# Altium PCB ControllerBoard.PcbDoc
Units mm, origin at the board's own origin, x right, y up, seen from the top; angles counter-clockwise.
Board outline 38.1 x 43.5 mm, 2 copper layers (Top Layer, Bottom Layer); 38 components, 23 nets, 91 pads, 12 vias.
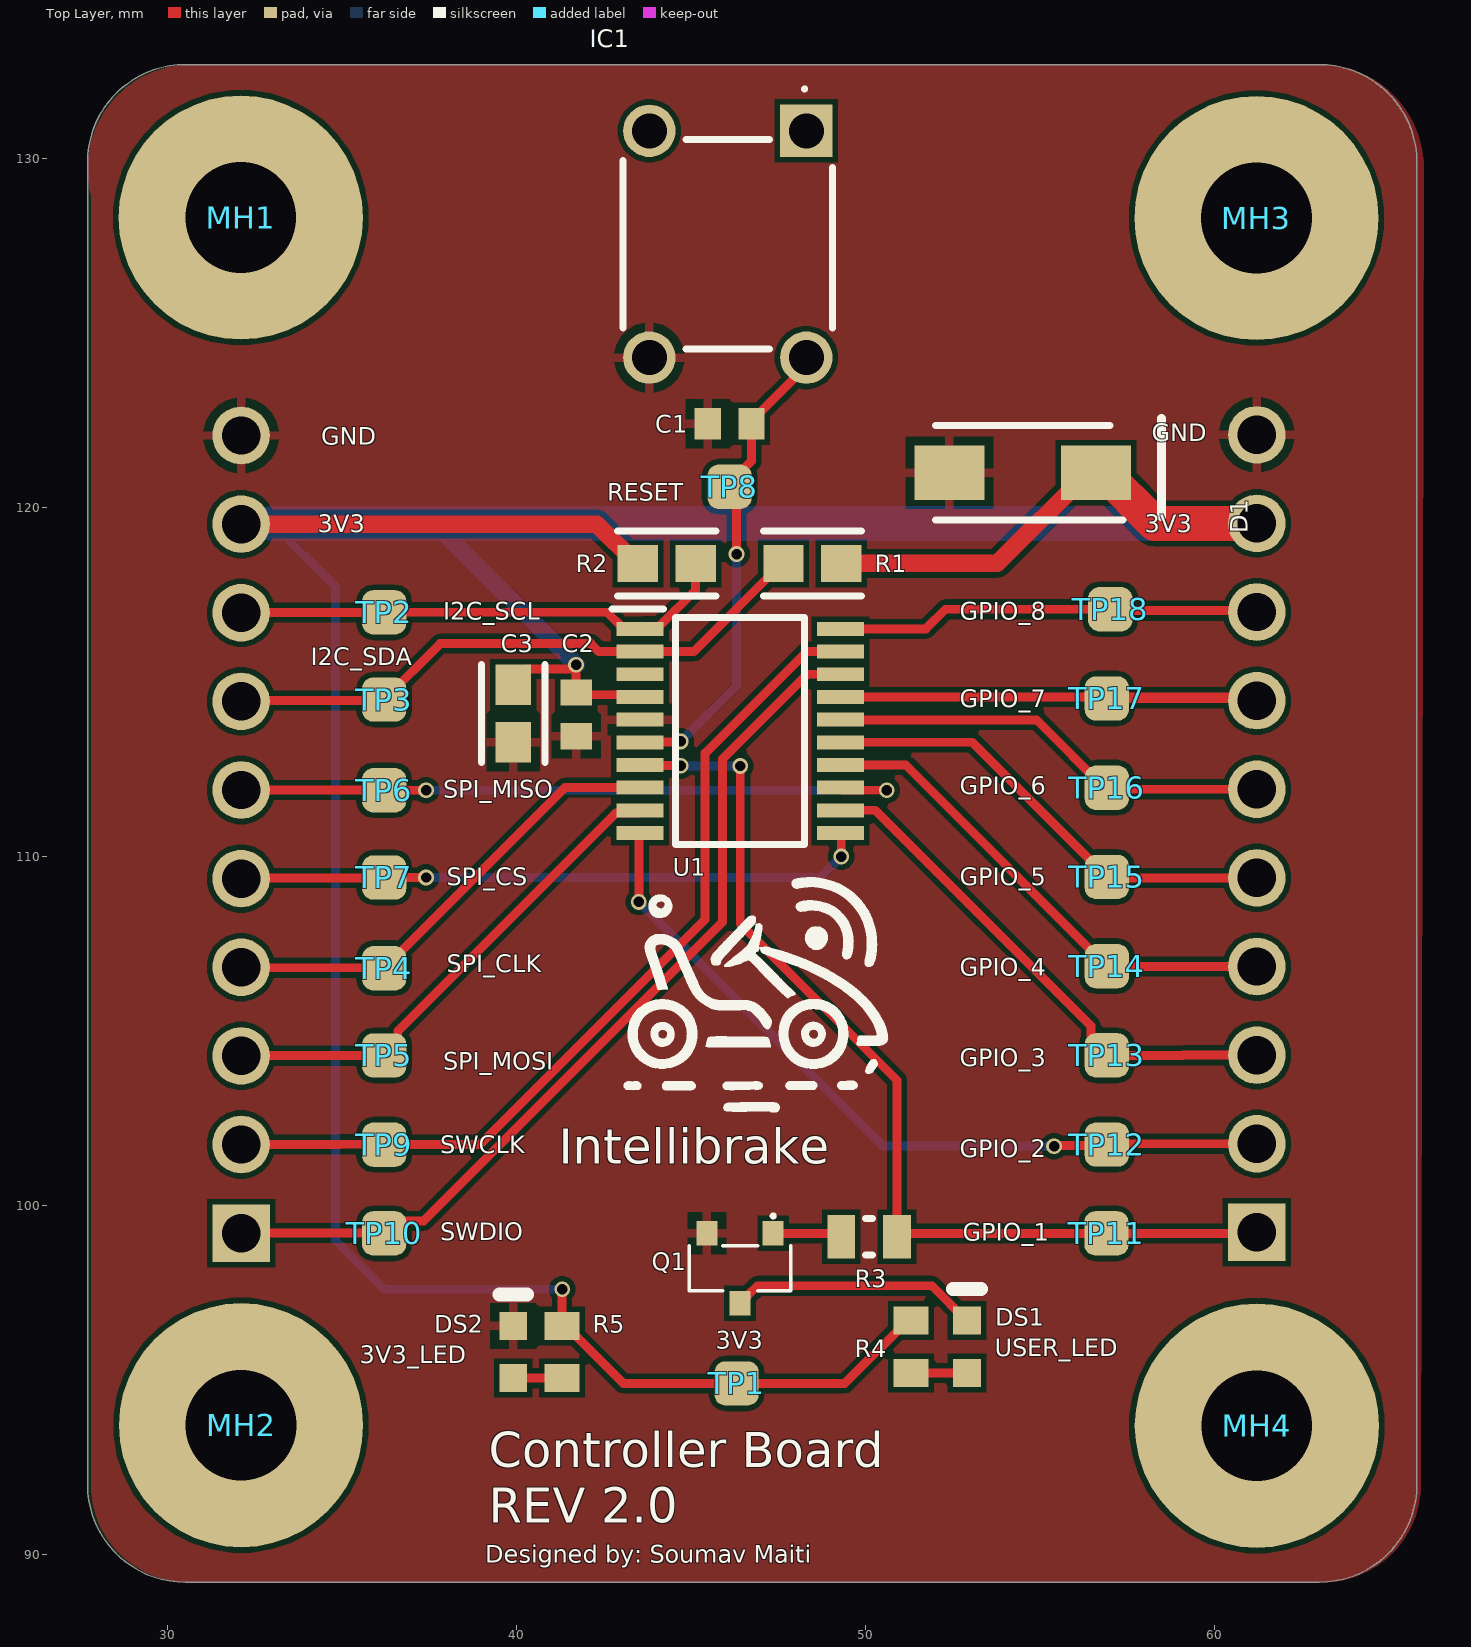
[diagram p0: Top Layer view]
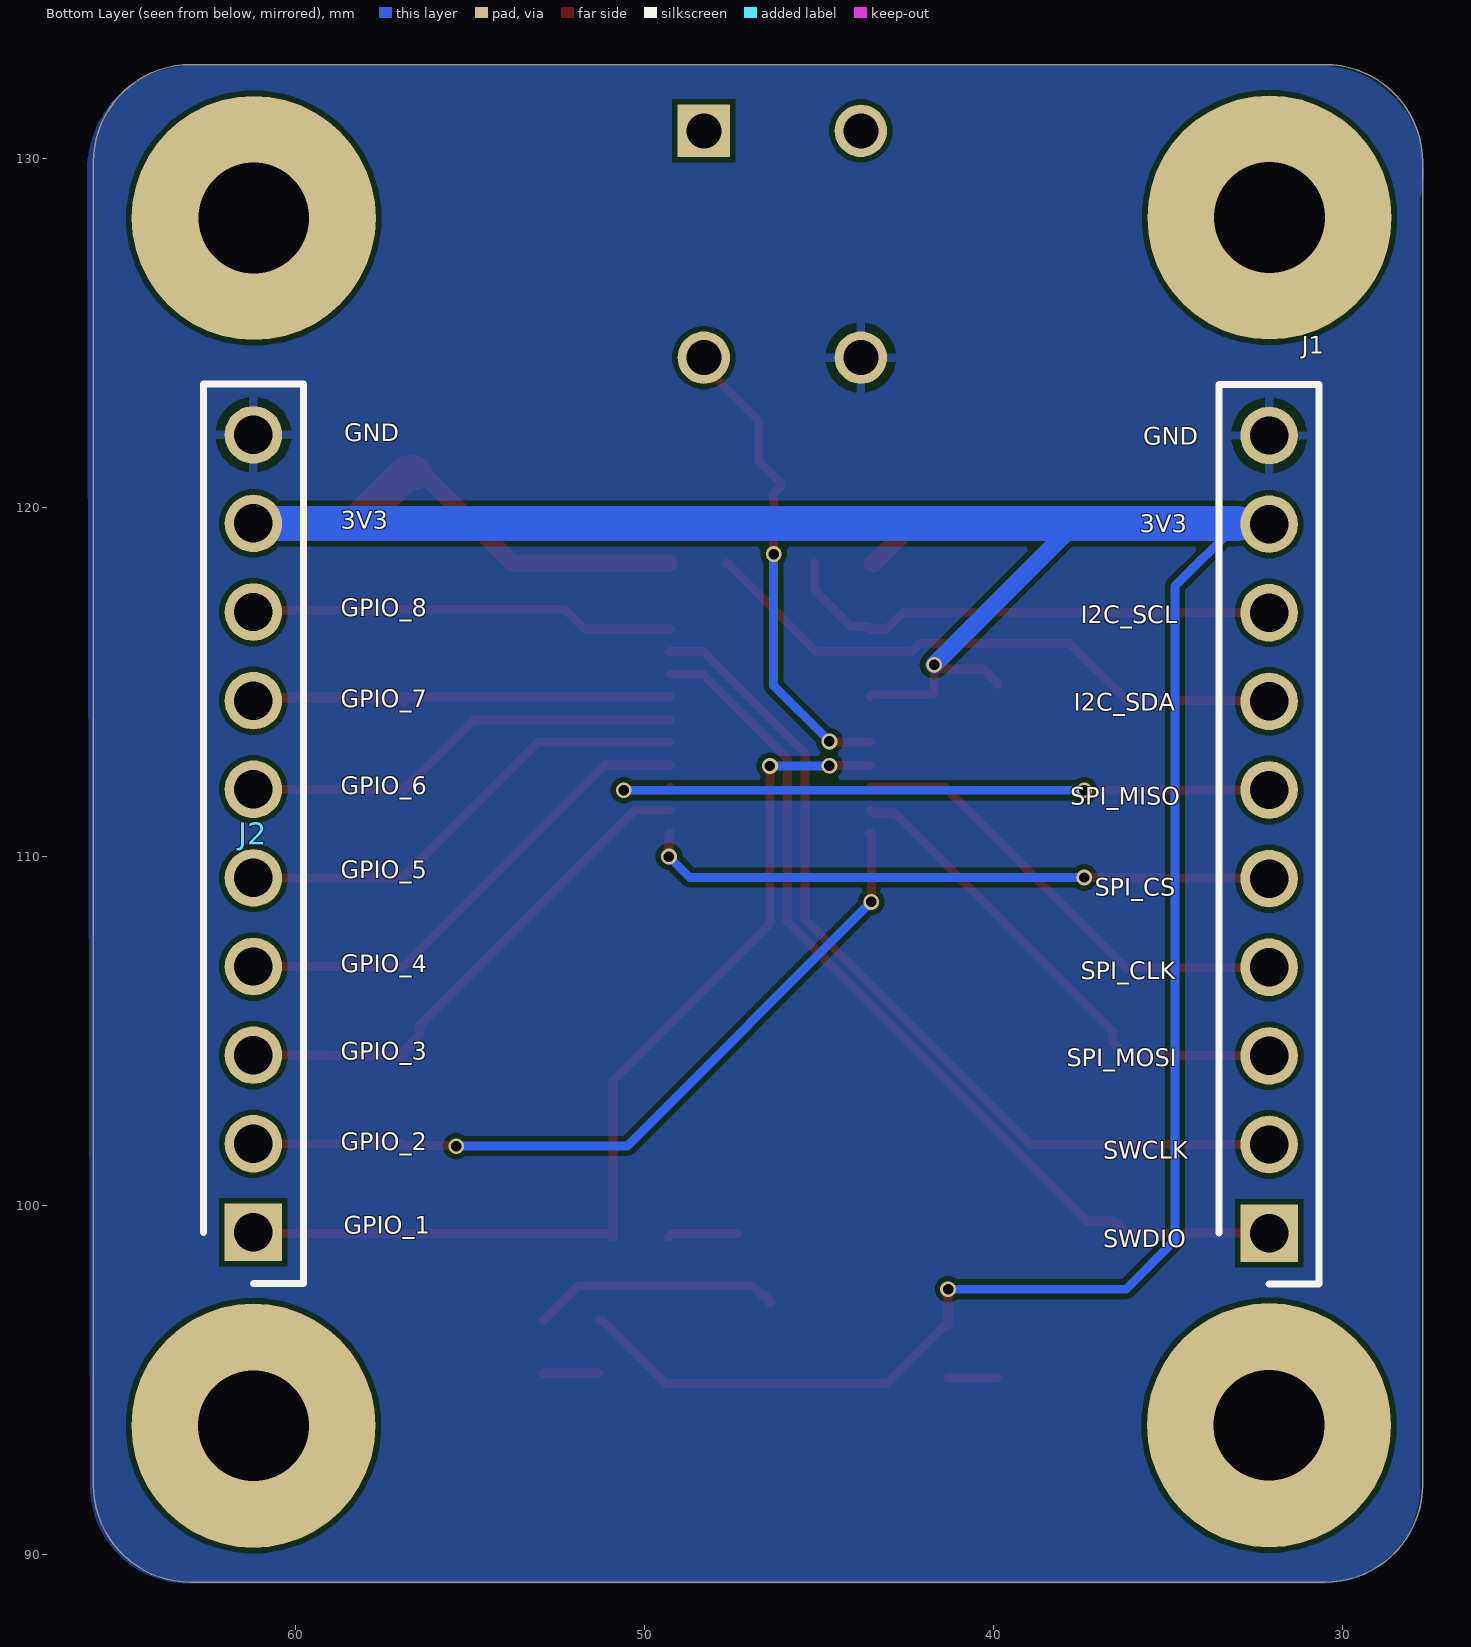
[diagram p1: Bottom Layer view, seen from below]
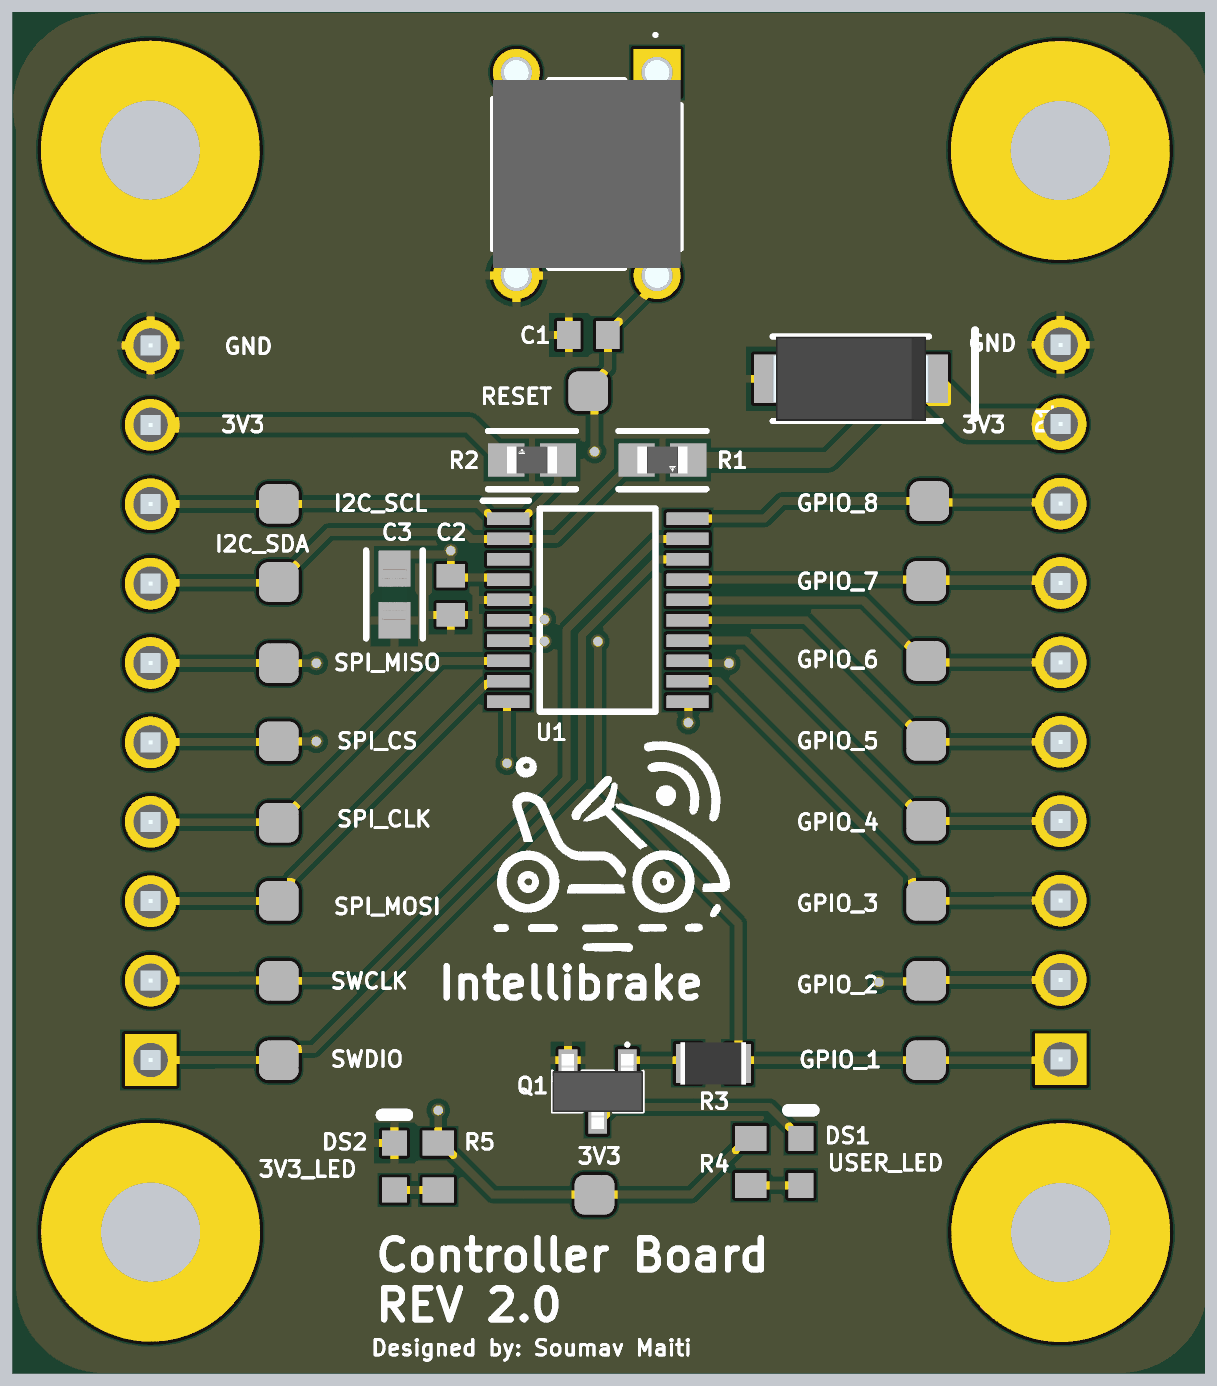
[diagram p2: 3D render of the assembled board from above, using the file's embedded part models]

## Layer stack, top to bottom
Top Solder: solder mask 0.0102, Solder Resist, Dk 3.5
Top Layer: signal copper 0.0356
Dielectric 1: dielectric 0.32, FR-4, Dk 4.8
Bottom Layer: signal copper 0.0356
Bottom Solder: solder mask 0.0102, Solder Resist, Dk 3.5

## Board outline
27.7,129.9 27.7,92 ccw(c30.5,92) 30.5,89.2 63,89.2 ccw(c63,92) 65.8,92 65.8,129.9 ccw(c63,129.9) 63,132.7 30.5,132.7 ccw(c30.5,129.9)

## Design rules (kind name [scope] priority, off if disabled: settings)
Clearance [All] p1: gap=0.15 ignorepadtopadclearanceinfootprint=FALSE except(0: SMDPad-Hole THPad-Hole Via-Hole Fill-Hole Poly-Hole Region-Hole Text-Hole; 0.254: Fill-Fill Fill-Poly Fill-Region Fill-Text Poly-Poly Poly-Region Poly-Text Region-Region Region-Text Text-Text)
HoleSize [All] p1: absolutevalues=TRUE maxlimit=5 minlimit=0.025 maxpercent=80.000 minpercent=20.000
PolygonConnect [All] p1: connectstyle=Relief reliefconductorwidth=0.254 reliefentries=4 polygonreliefangle="90 Angle" airgapwidth=0.254
RoutingVias [All] p1: holewidth=0.711 width=1.27 viastyle="Through Hole" minholewidth=0.711 minwidth=1.27 maxholewidth=0.711 maxwidth=1.27
SolderMaskExpansion [All] p1: expansion=0.102 istentingtop=FALSE
SupplyNets "Schematic Supply Nets_1" [InNet('GND')] p1: voltage=0.000
SupplyNets "Schematic Supply Nets" [InNet('3V3')] p2: voltage=0.000
Width [All] p1: maxlimit=2.54 minlimit=0.1 preferedwidth=0.254
29 further rules are at their usual default settings.

## Classes and differential pairs
component class MCU: C1 C2 C3 D1 DS1 DS2 IC1 J1 J2 MH1 MH2 MH3 MH4 Q1 R1 R2 R3 R4 R5 TP1 TP2 TP3 TP4 TP5 TP8 TP9 TP10 TP11 TP12 TP13 TP14 TP15 TP16 TP17 TP18 U1

## Components (designator, comment, footprint, x,y, rotation, side; value= is the part's Value field where it differs from the comment)
C1 "0.1uF" CAPC1608X92X38LL15T08 46.1,122.4 r0 top
C2 "0.1uF" CAPC1608X92X38LL15T08 41.7,114.075 r90 top
C3 "4.7uF" FP-CL10-IPC_A 39.9,114.1 r270 top
D1 "P4SMAJ5.0A" DIOM5027X240N 54.5,121 r180 top
DS1 "HSMY-C190" AVAG-HSMX-C190_V 52.9,95.95 r90 top
DS2 "HSMY-C190" AVAG-HSMX-C190_V 39.9,95.8 r90 top
IC1 "TS02-66-43-BK-160-SCR-D" TS026643BK160SCRD 48.3,130.8 r270 top
J1 "PH1-10-UA" HDRV10W64P0X254_1X10_2540X249X886P 32.1,99.208 r270 bottom
J2 "PH1-10-UA" HDRV10W64P0X254_1X10_2540X249X886P 61.211,99.228 r270 bottom
MH1 "MH?" "Mounting Hole" 32.089,128.312 r0 top
MH2 "MH?" "Mounting Hole" 32.1,93.7 r0 top
MH3 "MH?" "Mounting Hole" 61.2,128.3 r0 top
MH4 "MH?" "Mounting Hole" 61.211,93.688 r0 top
Q1 "T2N7002AK,LM" TBAT54CLM 46.4,98.2 r180 top
R1 "4.7k" FP-CRCW0603-HPe3-IPC_A 48.473,118.4 r0 top
R2 "4.7k" FP-CRCW0603-HPe3-IPC_A 44.3,118.4 r180 top
R3 "0Ohm" RESC2013X60X35LL10T20 50.1,99.1 r0 top
R4 "590" RESC1608X55X25ML10T15 51.3,95.95 r90 top
R5 "590" RESC1608X55X25ML10T15 41.3,95.8 r90 top
TP1 "TP" Testpoint 46.3,94.9 r90 top
TP2 "TP" Testpoint 36.2,117 r90 top
TP3 "TP" Testpoint 36.2,114.5 r180 top
TP4 "TP" Testpoint 36.2,106.8 r0 top
TP5 "TP" Testpoint 36.2,104.3 r0 top
TP6 "TP" Testpoint 36.2,111.9 r0 top
TP7 "TP" Testpoint 36.2,109.4 r0 top
TP8 "TP" Testpoint 46.1,120.6 r90 top
TP9 "TP" Testpoint 36.2,101.743 r270 top
TP10 "TP" Testpoint 36.2,99.2 r270 top
TP11 "TP" Testpoint 56.9,99.2 r270 top
TP12 "TP" Testpoint 56.911,101.745 r270 top
TP13 "TP" Testpoint 56.911,104.302 r270 top
TP14 "TP" Testpoint 56.911,106.859 r270 top
TP15 "TP" Testpoint 56.911,109.416 r270 top
TP16 "TP" Testpoint 56.911,111.973 r270 top
TP17 "TP" Testpoint 56.911,114.531 r270 top
TP18 "TP" Testpoint 57.011,117.088 r270 top
U1 "STM32C011F4P6" TSSOP20 46.4,113.6 r0 top

## Footprints (in the part's own frame and the unit in brackets; to place one, negate y for a bottom-side part, rotate by r counter-clockwise, add the part's x,y. Pads: shape width x height; smd on the part's side, far side on the other; paste and mask are expansions set on the pad)
AVAG-HSMX-C190_V [mm] "SMD, 2-Leads, Body 1.6x0.8mm, Height 0.9mm"
  rect 0.8x0.8 smd: 1(-0.75,0) 2(0.75,0)
  silkscreen extent 1.65,-0.4 1.65,0.4, body extent -0.8,-0.4 0.8,0.4, height 0.9
CAPC1608X92X38LL15T08 [mm] "Chip Capacitor, 2-Leads, Body 1.60x0.80mm, IPC High Density"
  rect 0.75x0.9 smd: 1(-0.625,0) 2(0.625,0)
  body extent -0.87,-0.48 0.87,0.48, height 0.92
DIOM5027X240N [mm]
  rect 2x1.55 smd: 1(-2.1,0) 2(2.1,0)
  silkscreen extent -3.98,-1.55 2.5,1.35, body extent -2.5,-1.35 2.5,1.35, height 2.4
FP-CL10-IPC_A [mm]
  rect 1.158x1.012 smd paste+0 mask+0: 1(-0.827,0) 2(0.827,0)
  silkscreen extent -1.41,-0.91 1.41,0.91, body extent -1.91,-1.01 1.91,1.01, height 0.25
FP-CRCW0603-HPe3-IPC_A [mm]
  rect 1.158x1.062 smd paste+0 mask+0: 1(-0.827,0) 2(0.827,0)
  silkscreen extent -1.41,-0.93 1.41,0.93, body extent -0.8,-0.43 0.8,0.43, height 0.55
HDRV10W64P0X254_1X10_2540X249X886P [mm]
  rect 1.65x1.65 hole 1.1: 1(0,0)
  round 1.65 hole 1.1: 2(-2.54,0) 3(-5.08,0) 4(-7.62,0) 5(-10.16,0) 6(-12.7,0) 7(-15.24,0) 8(-17.78,0) 9(-20.32,0) 10(-22.86,0)
  silkscreen extent -24.32,-1.44 1.46,1.43, body extent -24.13,-1.24 1.27,1.24, height 8.87
"Mounting Hole" [mm]
  round 7 hole 3.175: 4(0,0)
RESC1608X55X25ML10T15 [mm] "Chip Resistor, 2-Leads, Body 1.60x0.80mm, IPC Low Density"
  rect 0.8x1 smd: 1(-0.75,0) 2(0.75,0)
  body extent -0.85,-0.45 0.85,0.45, height 0.55
RESC2013X60X35LL10T20 [mm] "Chip Resistor, 2-Leads, Body 2.1x1.35mm, IPC High Density"
  rect 0.8x1.25 smd: 1(-0.8,0) 2(0.8,0)
  silkscreen extent -0.1,-0.53 0.1,0.52, body extent -1.05,-0.67 1.05,0.68, height 0.6
TBAT54CLM [mm]
  rect 0.6x0.7 smd: 1(-0.95,-1) 2(0.95,-1) 3(0,1)
  silkscreen extent -1.45,-1.55 1.45,0.65, body extent -1.45,-1.2 1.45,1.2, height 0.95
Testpoint [mm]
  rrect50% 1.27x1.27 smd: 0(0,0)
TS026643BK160SCRD [mm]
  rect 1.5x1.5 hole 1: 1(0,0)
  round 1.5 hole 1: 2(6.5,0) 3(0,-4.5) 4(6.5,-4.5)
  silkscreen extent -1.25,-5.25 6.25,0.75, body extent -0.4,-5.25 6.9,0.75, height 4.6
TSSOP20 [mm]
  rect 1.35x0.4 smd: 1(-2.863,2.925) 2(-2.863,2.275) 3(-2.863,1.625) 4(-2.863,0.975) 5(-2.863,0.325) 6(-2.863,-0.325) 7(-2.863,-0.975) 8(-2.863,-1.625) 9(-2.863,-2.275) 10(-2.863,-2.925) 11(2.875,-2.925) 12(2.875,-2.275) 13(2.875,-1.625) 14(2.875,-0.975) 15(2.875,-0.325) 16(2.875,0.325) 17(2.875,0.975) 18(2.875,1.625) 19(2.875,2.275) 20(2.875,2.925)
  silkscreen extent -3.68,-3.25 1.85,3.5, body extent -3.22,-3.25 3.2,3.25, height 1.35

## Part data
C1 C2: library part CMP-1035-02583-2, Manufacturer=Vitramon, Part Number=VJ0603Y104JXJAC
C3: library part CMP-13271-001817-1, "Cap Ceramic 4.7uF 6.3V X6S ±10% Pad SMD 0603 +105°C T/R", Case Code (Imperial)=0603, Case Code (Metric)=1608, Dielectric=X6S, Max Operating Temperature=105°C, Min Operating Temperature=-55°C, Package Quantity=1, Tolerance=10%, Voltage Rating=6.3V, Capacitance=4.7uF, Case/Package=0603, Depth=0.8mm, Height=0.8mm, Lead Free="Lead Free", Length=1.6mm, Mount="Surface Mount", Packaging="Tape and Reel", Radiation Hardening=No, Thickness=0.035inch, Voltage Rating (DC)=6.3V, Width=0.031inch
D1: "TVS Diode (Uni-directional)", Manufacturer_Name=Diotec, Datasheet Link=https://diotec.com/request/datasheet/p4smaj65.pdf, Height=2.4mm, Manufacturer_Part_Number=P4SMAJ5.0A
DS1 DS2: library part CMP-1744-00003-1, "LED Uni-Color Yellow, 65 mW, 20 mA, -40 to 85 degC, 2-Pin SMD, RoHS, Tape and Reel", Case Code (Imperial)=0603, Case Code (Metric)=1608, Max Operating Temperature="155 degC", Min Operating Temperature="-55 degC", Package Quantity=5000, Power Rating="100 mW", Resistance="390 Ohm", Tolerance=1%, Voltage Rating="50 V", Case\Package=0603, ComponentLink1Description="Manufacturer URL", ComponentLink1URL=http://www.avagotech.com/, ComponentLink2Description=Datasheet, ComponentLink2URL=http://docs.avagotech.com/docs/AV02-0551EN, ComponentLink3Description="Package Specification", ComponentLink3URL=http://www.fairchildsemi.com/dwg/MA/MA03D.pdf, DatasheetVersion=Mar-12, Height="0.45 mm", Length="1.6 mm", Mount="Surface Mount", PackageDescription="2-Pin Surface Mount Device, Body 1.6 x 0.8 mm, Height 0.9 mm", PackageReference=HSMX-C190, Packaging="Tape and Reel", Pins=2, REACH SVHC="No SVHC", RoHSCompliant=true, Voltage Rating (DC)="50 V", Width="0.8 mm"
IC1: "Integrated Circuit", Manufacturer_Name="Same Sky", Mouser Part Number=179-TS026643BK160SCR, Arrow Part Number=TS02-66-43-BK-160-SCR-D, Arrow Price/Stock=https://www.arrow.com/en/products/ts02-66-43-bk-160-scr-d/cui-devices?utm_currency=USD&region=nac, Datasheet Link=https://www.sameskydevices.com/product/resource/supplyframepdf/ts02.pdf, Height=4.5mm, Manufacturer_Part_Number=TS02-66-43-BK-160-SCR-D, Mouser Price/Stock=https://www.mouser.co.uk/ProductDetail/Same-Sky/TS02-66-43-BK-160-SCR-D?qs=A6eO%252BMLsxmTUKKq48hEHkA%3D%3D
J1 J2: "Connector", Manufacturer_Name="Adam Tech", Mouser Part Number=737-PH1-10-UA, Arrow Part Number=PH1-10-UA, Arrow Price/Stock=null?utm_currency=USD&region=nac, Datasheet Link=https://app.adam-tech.com/products/download/data_sheet/201605/ph1-xx-ua-data-sheet.pdf, Height=8.865mm, Manufacturer_Part_Number=PH1-10-UA, Mouser Price/Stock=https://www.mouser.co.uk/ProductDetail/Adam-Tech/PH1-10-UA?qs=ogqIPVdloe%252Bff9mnAAAy9w%3D%3D
MH1 MH2 MH3 MH4: library part "Mounting Hole"
Q1: "MOSFET (N-Channel)", Manufacturer_Name=Toshiba, Mouser Part Number=757-T2N7002AKLM, Arrow Part Number=T2N7002AK,LM, Arrow Price/Stock=https://www.arrow.com/en/products/t2n7002aklm/toshiba?utm_currency=USD&region=nac, Datasheet Link=http://toshiba.semicon-storage.com/info/docget.jsp?did=29712&prodName=T2N7002AK, Height=1.1mm, Manufacturer_Part_Number=T2N7002AK,LM, Mouser Price/Stock=https://www.mouser.co.uk/ProductDetail/Toshiba/T2N7002AKLM?qs=pzVvXTvk9PzfX4hYglwZ9Q%3D%3D
R1 R2: library part CMP-2000-03414-2, "RES Thick Film, 4.7kΩ, 5%, 0.33W, 200ppm/°C, 0603", Case Code (Imperial)=0603, Case Code (Metric)=1608, Max Operating Temperature=155°C, Max Power Dissipation=250mW, Min Operating Temperature=-55°C, Package Quantity=1, Resistance=4.7kR, Resistor Type="Thick Film", Temperature Coefficient=200ppm/°C, Tolerance=5%, Voltage Rating=75V, Case/Package=0603, Contact Plating=Tin, Features="Automotive AEC-Q200", Height=0.022inch, Lead Free="Lead Free", Length=0.063inch, Number of Terminations=2, Packaging="Tape and Reel", Power Rating=250mW, Radiation Hardening=No, RoHS Compliant=Yes, Series=CRCW-HP, Weight=7.1E-05oz, Width=0.033inch
R3: library part CMP-2000-06963-1, "Chip Resistor, 0 Ohm, +/- 5%, 125 mW, -55 to 155 degC, 0805 (2012 Metric), RoHS, Tape and Reel", Case Style=Molded, Manufacturer=Yageo, Operating Temp Range=-55Cto155C, Package / Case=0805, Package Description="2-Pin Surface Mounted Device, Body 2 x 1.25 mm", Power Rating(s)=NotRequiredW, Temperature Coefficient=NotRequired, Construction=Rectangular, Datasheet URL=http://www.yageo.com/documents/recent/PYu-RC_Group_51_RoHS_L_7.pdf, Datasheet Version="Rev. 7, 05/2017", Failure Rate=NotRequired, Manufacturer URL=http://www.yageo.com/, Military Standard=NotRequired, Mounting Technology=SurfaceMount, Package Reference=0805, Packaging=TapeandReel, Product Depth (mm)=1.25mm, Product Height (mm)=0.5mm, Product Length (mm)=2mm, Termination Style=NotRequired, Tolerance (+ or -)=NotRequired, Type=ThickFilm
R4 R5: library part CMP-2000-04089-1, Manufacturer=Yageo, Part Number=RC0603FR-07590RL
TP1 TP2 TP3 TP4 TP5 TP6 TP7 TP8 TP9 TP10 TP11 TP12 TP13 TP14 TP15 TP16 TP17 TP18: library part Testpoint

## Via types
v1: diameter 0.45, hole 0.3, Top Layer to Bottom Layer, tented both sides, 12 vias

## Nets (pads, with @x,y where several pads share a name; then routed paths per layer and width w, separated by ;. In a path a pad name is that pad's centre, name@x,y a point inside that pad or via, vN(x,y) a via of type N, cw(c..) or ccw(c..) an arc to the next point about the centre after c; other vN are vias at no path point)
3V3: C2.2 C3.1 D1.1 J1.9 J2.9 R1.2 R2.2 R4.2 R5.2 TP1.0 U1.4 | length 105
  Top Layer w0.254: C3.1 39.9,115 40.279,115.379 41.526,115.379 41.647,115.5 v1(41.7,115.5) C2.2 41.763,114.637 43.475,114.637 U1.4 ; v1(41.3,97.6) R5.2 41.4,96.55 43.05,94.9 TP1.0 49.4,94.9 51.2,96.7 R4.2
  Top Layer w0.5: J1.9 42.298,119.528 43.425,118.4 R2.2 ; R1.2 53.775,118.4 56.375,121 D1.1
  Top Layer w1: D1.1 56.825,121 58.277,119.548 J2.9
  Bottom Layer w0.254: 33,119.544 34.8,117.744 34.8,99 36.2,97.6 v1(41.3,97.6)
  Bottom Layer w0.5: 37.656,119.544 v1(41.7,115.5)
  Bottom Layer w1: 33,119.544 37.656,119.544 61.207,119.544 J2.9
!RST: C1.2 IC1.2 TP8.0 U1.6 | length 13.8
  Top Layer w0.254: U1.6 43.55,113.288 44.688,113.288 v1(44.7,113.3) ; v1(46.3,118.669) 46.3,120.4 TP8.0 46.1,120.703 46.725,121.328 C1.2 46.725,122.475 48.3,124.05 IC1.2
  Bottom Layer w0.254: v1(44.7,113.3) 46.3,114.9 v1(46.3,118.669)
GND: C1.1 C2.1 C3.2 D1.2 DS2.2 IC1.4 J1.10 J2.10 Q1.2 U1.5 | length 0.1
  Bottom Layer w1: J1.10 J1.10@32.12,122.048 ; J2.10@61.211,122.048 J2.10
GPIO1: J2.1 R3.2 TP11.0 U1.7 | length 28.6
  Top Layer w0.254: U1.7 43.55,112.613 44.687,112.613 v1(44.7,112.6) ; v1(46.405,112.595) 46.405,108.076 50.9,103.581 R3.2 ; R3.2@50.9,99.2 TP11.0 61.183,99.2 J2.1
  Bottom Layer w0.254: v1(44.7,112.6) 44.702,112.598 46.402,112.598 v1(46.405,112.595)
GPIO2: J2.2 TP12.0 U1.10 | length 22.6
  Top Layer w0.254: v1(43.5,108.7) 43.5,110.638 U1.10 ; v1(55.4,101.7) 55.422,101.722 56.889,101.722 TP12.0 56.934,101.768 J2.2
  Bottom Layer w0.254: v1(43.5,108.7) 50.5,101.7 v1(55.4,101.7)
GPIO3: J2.3 TP13.0 U1.12 | length 15.1
  Top Layer w0.254: U1.12 50.275,111.325 56.454,105.146 56.454,104.863 56.911,104.405 TP13.0 59.09,104.302 59.096,104.308 J2.3
GPIO4: J2.4 TP14.0 U1.14 | length 14.3
  Top Layer w0.254: U1.14 51.145,112.625 TP14.0 56.923,106.848 J2.4
GPIO5: J2.5 TP15.0 U1.15 | length 13.5
  Top Layer w0.254: U1.15 53.052,113.275 TP15.0 56.94,109.388 J2.5
GPIO6: J2.6 TP16.0 U1.16 | length 12.9
  Top Layer w0.254: U1.16 49.287,113.913 54.9,113.913 56.911,111.902 TP16.0 56.957,111.928 J2.6
GPIO7: J2.7 TP17.0 U1.17 | length 21.9
  Top Layer w0.254: U1.17 61.682,114.575 61.211,114.574 56.911,114.563 56.793,114.563 56.911,114.445 TP17.0 61.148,114.531 J2.7
GPIO8: J2.8 TP18.0 U1.20 | length 12.2
  Top Layer w0.254: U1.20 51.725,116.525 52.288,117.088 TP18.0 57.051,117.048 61.171,117.048 J2.8
I2C_SCL: J1.8 R2.1 TP2.0 U1.1 | length 14.5
  Top Layer w0.254: J1.8 32.106,116.994 36.194,116.994 TP2.0 42.587,117 43.062,116.525 U1.1 43.61,116.598 44.085,116.598 45.124,117.637 45.124,118.397 R2.1
I2C_SDA: J1.7 R1.1 TP3.0 U1.2 | length 17.4
  Top Layer w0.254: J1.7 32.126,114.474 36.174,114.474 TP3.0 37.802,116.102 42.127,116.102 42.354,115.875 45.073,115.875 47.598,118.4 R1.1
NetDS1_1: DS1.1 R4.1 | length 1.6
  Top Layer w0.254: R4.1 DS1.1
NetDS1_2: DS1.2 Q1.3 | length 7.2
  Top Layer w0.254: Q1.3 46.4,97.25 46.573,97.423 46.623,97.423 46.9,97.7 51.9,97.7 DS1.2
NetDS2_1: DS2.1 R5.1 | length 1.4
  Top Layer w0.254: DS2.1 R5.1
NetQ1_1: Q1.1 R3.1 | length 2
  Top Layer w0.254: Q1.1 49.2,99.2 R3.1
SPI_CLK: J1.4 TP4.0 U1.8 | length 13.5
  Top Layer w0.254: J1.4 32.114,106.814 TP4.0@36.086,106.814 ; TP4.0 41.375,111.975 U1.8
SPI_CS: J1.5 TP7.0 U1.11 | length 18.1
  Top Layer w0.254: J1.5 32.116,109.384 36.184,109.384 TP7.0 v1(37.4,109.4) ; U1.11 49.3,110.65 v1(49.3,110)
  Bottom Layer w0.254: v1(37.4,109.4) 48.7,109.4 v1(49.3,110)
SPI_MISO: J1.6 TP6.0 U1.13 | length 19.9
  Top Layer w0.254: J1.6 32.104,111.904 36.196,111.904 TP6.0 v1(37.4,111.9) ; U1.13 49.348,111.902 49.992,111.902 49.994,111.9 v1(50.6,111.9)
  Bottom Layer w0.254: v1(37.4,111.9) v1(50.6,111.9)
SPI_MOSI: J1.3 TP5.0 U1.9 | length 14.4
  Top Layer w0.254: J1.3 32.106,104.294 TP5.0@36.094,104.294 ; TP5.0 36.59,104.69 36.59,104.995 42.847,111.252 43.464,111.252 U1.9
SWCLK: J1.2 TP9.0 U1.19 | length 25.8
  Top Layer w0.254: J1.2 34.92,101.748 34.925,101.752 36.19,101.752 TP9.0 38.943,101.743 45.4,108.2 45.4,112.964 48.311,115.875 U1.19
SWDIO: J1.1 TP10.0 U1.18 | length 26.6
  Top Layer w0.254: J1.1 34.133,99.208 34.138,99.212 36.188,99.212 TP10.0 36.557,99.557 37.329,99.557 45.9,108.129 45.9,112.8 48.325,115.225 U1.18
pads on no net: IC1.1 IC1.3 MH1.4 MH2.4 MH3.4 MH4.4 U1.3

## Polygon pours and split planes (outlines as drawn)
GND on Top Layer "GND_L01_P001" (solid, remove dead copper, pour order 1): 63.003,132.7 30.704,132.7 ccw(c30.7,129.7) 27.8,128.932 27.8,92 ccw(c30.6,92) 30.6,89.2 63.094,89.2 ccw(c63.094,92.013) 65.906,92.006 65.993,129.703 ccw(c63.004,129.71)
GND on Bottom Layer "GND_L02_P000" (solid, remove dead copper, pour order 0): 62.98,132.665 30.68,132.665 ccw(c30.676,129.666) 27.776,128.897 27.776,91.965 ccw(c30.576,91.965) 30.576,89.165 63.07,89.165 ccw(c63.07,91.978) 65.882,91.972 65.969,129.669 ccw(c62.98,129.676)

## Silkscreen, mask and mechanical layers (free items; w line width, h text height)
Top Overlay:
  drawing of 20 lines, arcs and shapes, not listed
  text "GND" at 58.2,121.9 h0.5
  text "GND" at 34.4,121.8 h0.5
  text "RESET" at 42.6,120.2 h0.5
  text "3V3" at 34.3,119.3 h0.5
  text "3V3" at 58,119.3 h0.5
  text "I2C_SCL" at 37.9,116.783 h0.5
  text "GPIO_8" at 52.7,116.783 h0.5
  text "I2C_SDA" at 34.1,115.483 h0.5
  text "GPIO_7" at 52.7,114.283 h0.5
  text "GPIO_6" at 52.7,111.783 h0.5
  text "SPI_MISO" at 37.9,111.683 h0.5
  text "SPI_CS" at 38,109.183 h0.5
  text "GPIO_5" at 52.7,109.183 h0.5
  text "SPI_CLK" at 38,106.683 h0.5
  text "GPIO_4" at 52.7,106.583 h0.5
  text "GPIO_3" at 52.7,103.983 h0.5
  text "SPI_MOSI" at 37.9,103.883 h0.5
  text "SWCLK" at 37.8,101.5 h0.5
  text "GPIO_2" at 52.7,101.383 h0.5
  text "Intellibrake" at 41.2,101.2 h1
  text "SWDIO" at 37.8,99 h0.5
  text "GPIO_1" at 52.783,98.983 h0.5
  text "3V3" at 45.7,95.9 h0.5
  text "USER_LED" at 53.7,95.683 h0.5
  text "3V3_LED" at 35.5,95.483 h0.5
  text "Controller Board" at 39.2,92.5 h1
  text "REV 2.0" at 39.2,90.9 h1
  text "Designed by: Soumav Maiti" at 39.1,89.767 h0.5
Bottom Overlay:
  text "GND" at 58.6,121.9 h0.5
  text "GND" at 35.7,121.8 h0.5
  text "3V3" at 58.7,119.4 h0.5
  text "3V3" at 35.8,119.3 h0.5
  text "GPIO_8" at 58.7,116.883 h0.5
  text "I2C_SCL" at 37.5,116.683 h0.5
  text "GPIO_7" at 58.7,114.283 h0.5
  text "I2C_SDA" at 37.7,114.183 h0.5
  text "GPIO_6" at 58.7,111.783 h0.5
  text "SPI_MISO" at 37.8,111.483 h0.5
  text "GPIO_5" at 58.7,109.383 h0.5
  text "SPI_CS" at 37.1,108.883 h0.5
  text "GPIO_4" at 58.7,106.683 h0.5
  text "SPI_CLK" at 37.5,106.483 h0.5
  text "GPIO_3" at 58.7,104.183 h0.5
  text "SPI_MOSI" at 37.9,103.983 h0.5
  text "GPIO_2" at 58.7,101.583 h0.5
  text "SWCLK" at 36.858,101.343 h0.5
  text "GPIO_1" at 58.617,99.183 h0.5
  text "SWDIO" at 36.858,98.8 h0.5